# Altium PCB Combo 1.PcbDoc
Units mil, origin at the board's own origin, x right, y up, seen from the top; angles counter-clockwise.
Board outline not stored, 4 copper layers (Top Layer, Internal Plane 2, Internal Plane 1, Bottom Layer); 61 components, 0 nets, 218 pads, 145 vias.
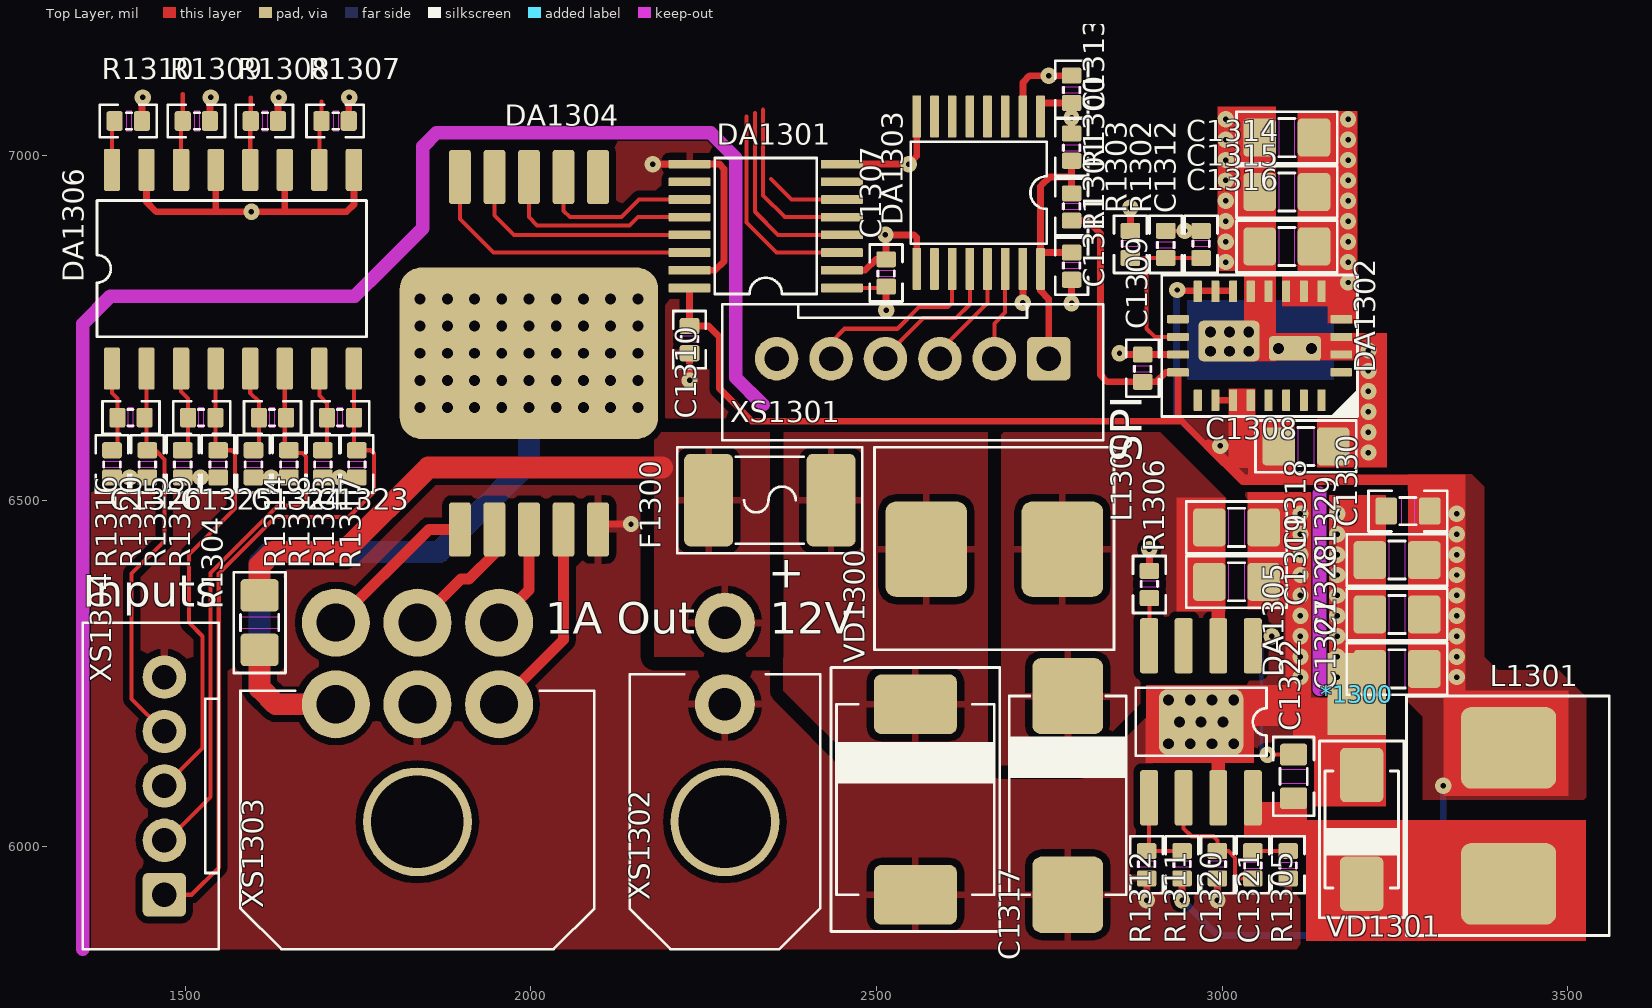
[diagram p0: Top Layer view]
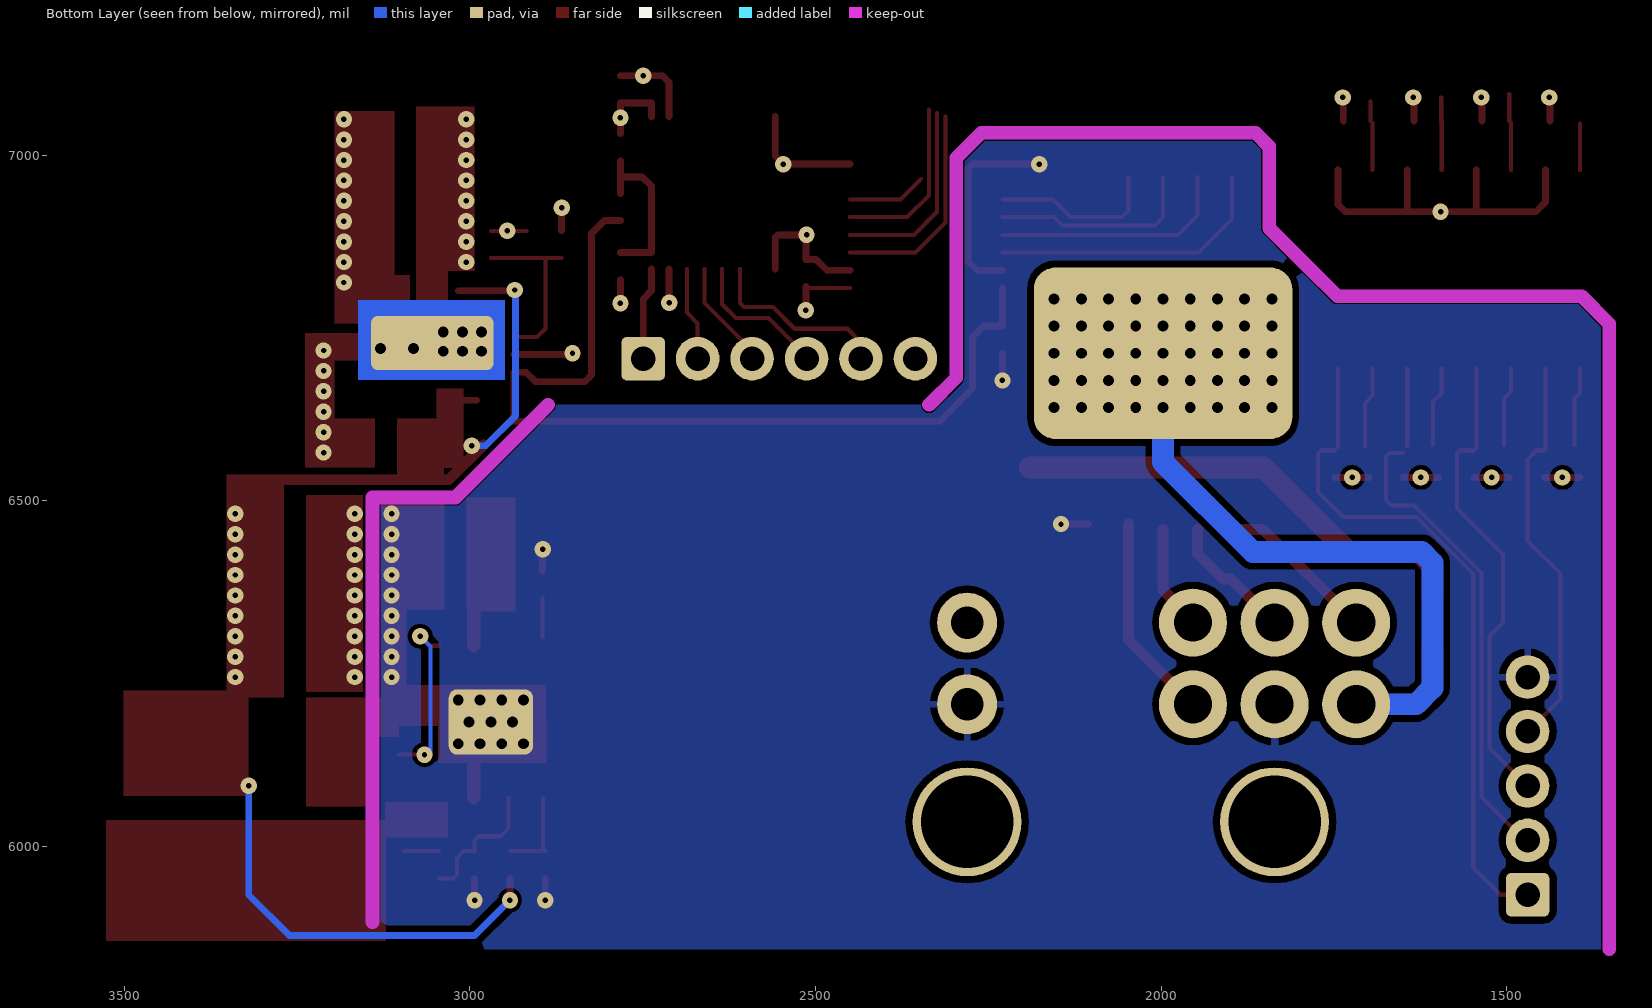
[diagram p1: Bottom Layer view, seen from below]
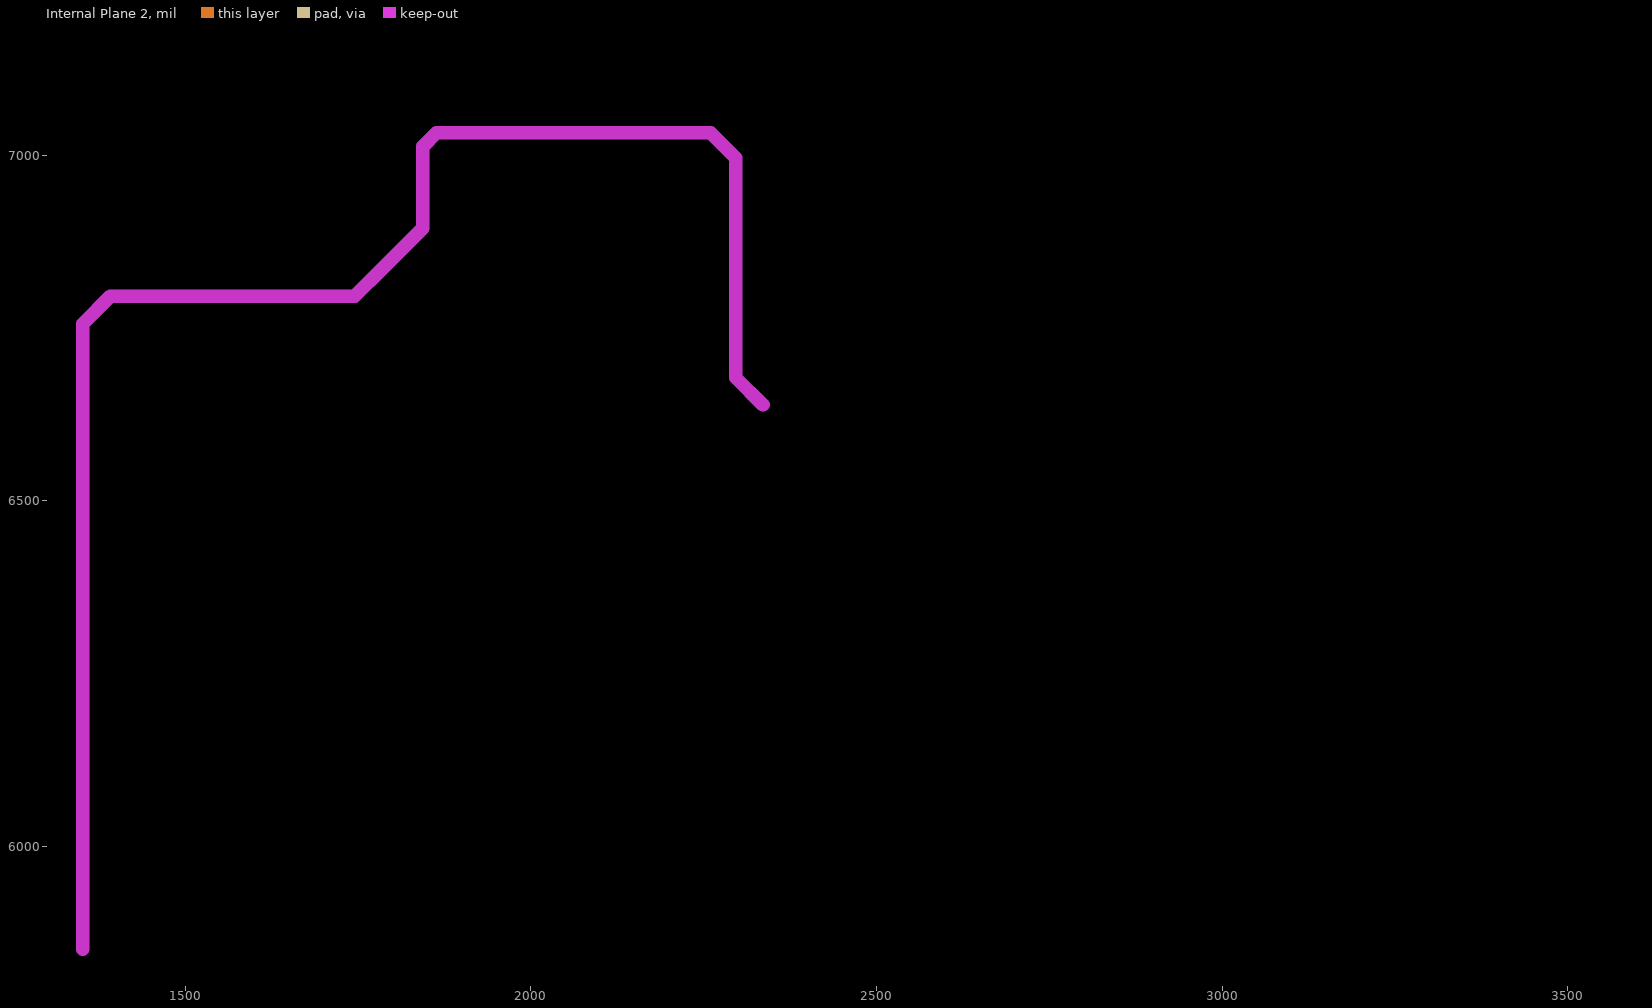
[diagram p2: Internal Plane 2, clearances drawn from the general rule]
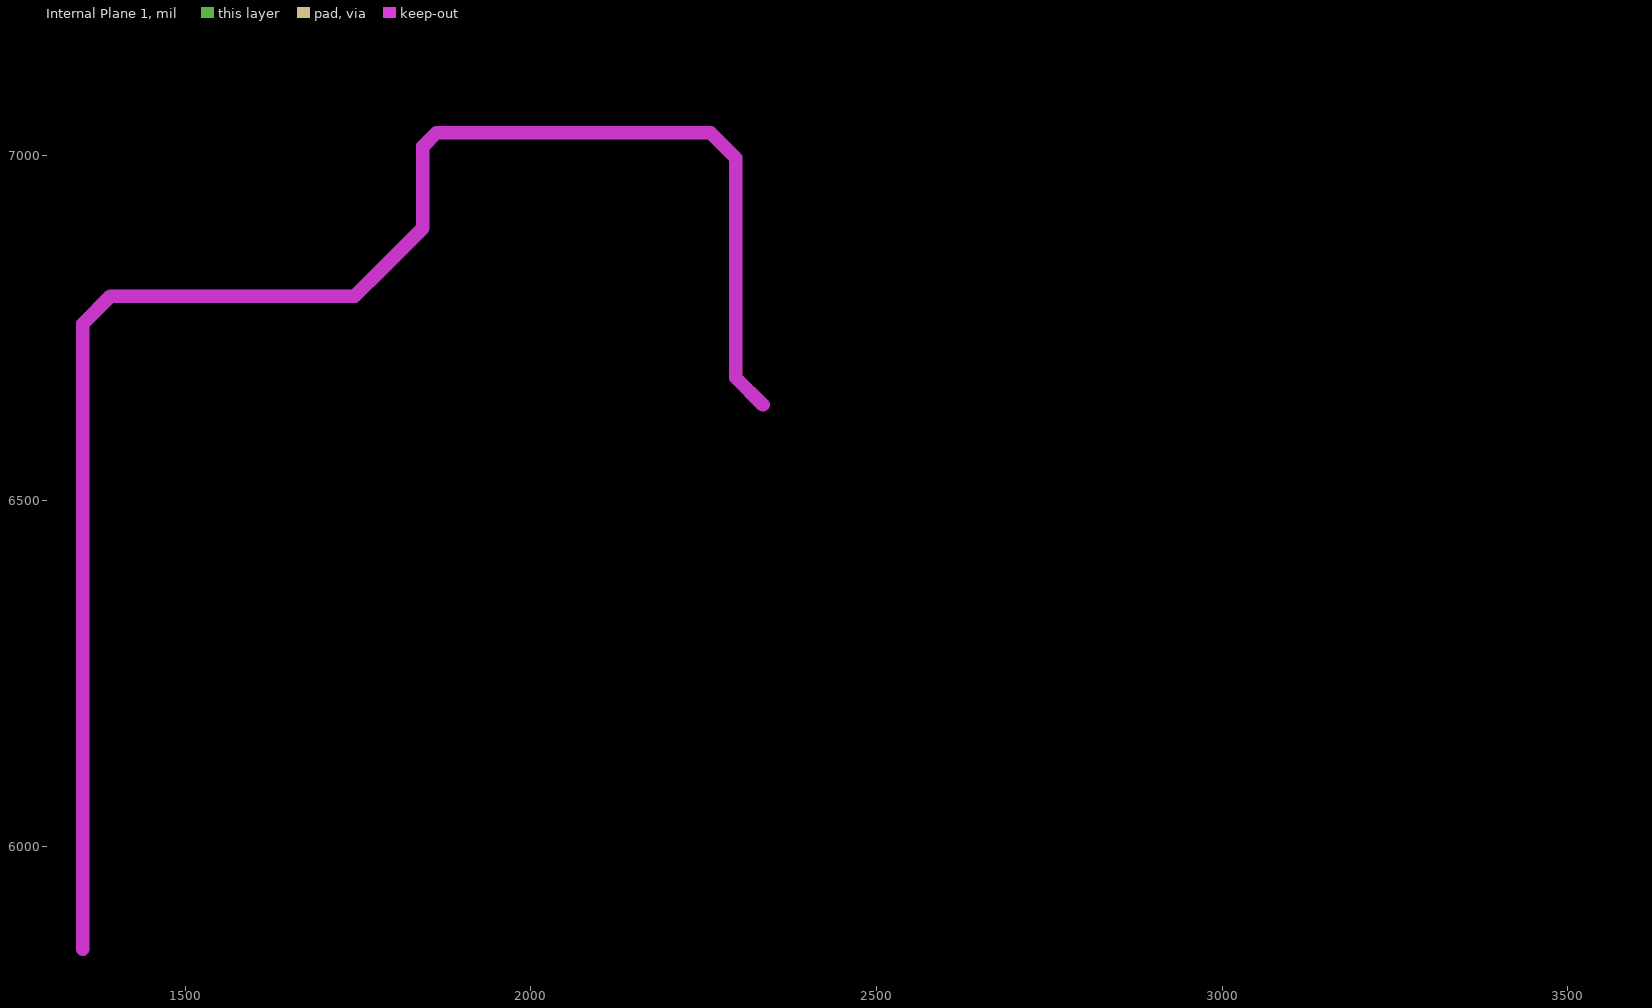
[diagram p3: Internal Plane 1, clearances drawn from the general rule]

## Layer stack, top to bottom
Top Solder: solder mask 0.4, Solder Resist, Dk 3.5
Top Layer: signal copper 1.4
Dielectric 1: dielectric 12.6, FR-4, Dk 4.8
Internal Plane 2: plane copper 1.4
Dielectric2: dielectric 12.6, FR-4, Dk 4.8
Internal Plane 1: plane copper 1.4
Dielectric3: dielectric 12.6, FR-4, Dk 4.8
Bottom Layer: signal copper 1.4
Bottom Solder: solder mask 0.4, Solder Resist, Dk 3.5

## Design rules (kind name [scope] priority, off if disabled: settings)
RoomDefinition "Power, DiscIO, SPI" [InComponentClass('Components Class 1')] p1: confinementstyle=ConfineIn formatcopy=TRUE lockcomponents=FALSE outline 1312.2,5811.93 3595.67,5811.93 3595.67,7150.51 1312.2,7150.51

## Components (designator, comment, footprint, x,y, rotation, side; value= is the part's Value field where it differs from the comment)
*1300 "Перемычка" Перемычка 3195.08,6220.39 r90 top
C1307 "0,1" CAP0402 2513.98,6809.96 r90 top
C1308 "22,0" CAP0805#1 3081.89,6578.66 r0 top
C1309 "1,0" CAP0402 2885.04,6672.17 r90 top
C1310 "0,1" CAP0402 2229.53,6752.87 r270 top
C1311 "0,1" CAP0402 2782.28,6859.17 r270 top
C1312 "18" CAP0402 2969.68,6890.67 r270 top
C1313 "0,1" CAP0402 2782.28,7075.71 r90 top
C1314 "22,0" CAP0805#1 3133.07,7025.51 r180 top
C1315 "22,0" CAP0805#1 3133.07,6946.77 r180 top
C1316 "22,0" CAP0805#1 3133.07,6868.03 r180 top
C1317 "47x25V" CAP_D 2776.77,6217.44 r270 top
C1318 "2,2" CAP0805#1 2981.5,6461.54 r0 top
C1319 "2,2" CAP0805#1 2981.5,6382.79 r0 top
C1320 "3,3pF" CAP0402 2993.31,5993.03 r270 top
C1321 "4700" CAP0402 3044.49,5953.66 r90 top
C1322 "0,1" CAP0603#1 3103.54,6132.8 r270 top
C1323 "0,1" CAP0402 1704.94,6620.39 r0 top
C1324 "0,1" CAP0402 1606.51,6620.39 r0 top
C1325 "0,1" CAP0402 1504.15,6620.39 r0 top
C1326 "0,1" CAP0402 1401.79,6620.39 r0 top
C1327 "22,0" CAP0805#1 3292.52,6256.81 r180 top
C1328 "22,0" CAP0805#1 3292.52,6335.56 r180 top
C1329 "22,0" CAP0805#2 3253.15,6414.29 r180 top
C1330 "2,2" CAP0603#2 3268.9,6485.16 r180 top
DA1301 "ISO7140F" TSSOP16 2450,6807.99 r180 top
DA1302 "EN5339QI" EN5339QI 3054.33,6724.33 r180 top
DA1303 "ISO7141" TSSOP16 2737.4,7056.02 r270 top
DA1304 "VN340SP" PowerSO10 1997.24,6713.5 r0 top
DA1305 "TPS54340" SO8-3.9_P 2969.69,6180.04 r270 top
DA1306 "TLP281-4" SOP16 1393.91,6695.19 r90 top
F1300 "1,5A" MF-MSMF 2257.09,6500.91 r0 top
L1300 "10uH" IND2525 2670.47,6430.04 r0 top
L1301 "6,8uH" IND2525 3414.57,6044.21 r90 top
R1300 "0*" RES0402 2782.28,6992.05 r90 top
R1301 "0*" RES0402 2782.28,6944.8 r270 top
R1302 "330K" RES0402 2918.5,6851.3 r90 top
R1303 "75K" RES0402 2867.32,6890.67 r270 top
R1304 "0" RES0805 1607.48,6284.37 r90 top
R1305 "24K" RES0402 3095.67,5953.66 r90 top
R1306 "150K" RES0402 2894.88,6398.54 r270 top
R1307 "2,2K" RES0402 1736.43,7049.52 r180 top
R1308 "2,2K" RES0402 1634.07,7049.52 r180 top
R1309 "2,2K" RES0402 1535.65,7049.52 r180 top
R1310 "2,2K" RES0402 1437.22,7049.52 r180 top
R1311 "62K" RES0402 2942.13,5993.03 r270 top
R1312 "12K" RES0402 2890.94,5993.03 r270 top
R1313 "4,7K" RES0402 1699.03,6533.77 r90 top
R1314 "4,7K" RES0402 1598.64,6533.77 r90 top
R1315 "4,7K" RES0402 1496.28,6533.77 r90 top
R1316 "4,7K" RES0402 1393.91,6533.77 r90 top
R1317 "10K" RES0402 1748.24,6533.77 r90 top
R1318 "10K" RES0402 1649.82,6533.77 r90 top
R1319 "10K" RES0402 1547.47,6533.77 r90 top
R1320 "10K" RES0402 1445.09,6533.77 r90 top
VD1300 "SMCJ26A" SMC 2556.3,5910.35 r90 top
VD1301 "SX34" SMA 3201.97,6103.27 r270 top
XS1301 "SPI" MW-6M 2749.21,6705.63 r180 top
XS1302 "12V" uF-2X1R 2280.71,6323.74 r270 top
XS1303 "1A Out" uF-2X3R 1953.94,6323.74 r270 top
XS1304 "Inputs" MW-5M 1469.69,5930.04 r90 top

## Footprints (in the part's own frame and the unit in brackets; to place one, negate y for a bottom-side part, rotate by r counter-clockwise, add the part's x,y. Pads: shape width x height; smd on the part's side, far side on the other; paste and mask are expansions set on the pad)
CAP0402 [mm]
  rrect25% 0.59x0.72 smd: 1(0,0) 2(1,0)
  Top Layer keep-out region: 0.375,0.36 0.375,-0.36 0.575,-0.36 0.575,0.36
  silkscreen extent -0.55,-0.6 1.55,0.6, body extent 0,-0.25 1,0.25, height 0.49
CAP0603#1 [mm]
  rrect25% 0.8x1 smd: 1(0,0) 2(1.6,0)
  Top Layer keep-out region: 0.55,0.5 0.55,-0.5 1.05,-0.5 1.05,0.5
  silkscreen extent -0.65,-0.75 2.25,0.75, body extent 0,-0.4 1.6,0.4, height 0.65
CAP0603#2 [mm]
  rrect25% 0.8x1 smd: 1(-0.8,0) 2(0.8,0)
  Top Layer keep-out region: -0.25,0.5 -0.25,-0.5 0.25,-0.5 0.25,0.5
  silkscreen extent -1.45,-0.75 1.45,0.75, body extent -0.8,-0.4 0.8,0.4, height 0.65
CAP0805#1 [mm]
  rrect25% 1.2x1.4 smd: 1(0,0) 2(2,0)
  Top Layer keep-out region: 0.7,-0.7 1.3,-0.7 1.3,0.7 0.7,0.7
  silkscreen extent -0.85,-0.95 2.85,0.95, body extent 0,-0.62 2,0.63, height 1
CAP0805#2 [mm]
  rrect25% 1.2x1.4 smd: 1(-1,0) 2(1,0)
  Top Layer keep-out region: -0.3,-0.7 0.3,-0.7 0.3,0.7 -0.3,0.7
  silkscreen extent -1.85,-0.95 1.85,0.95, body extent -1,-0.62 1,0.63, height 1
CAP_D [mm]
  rrect25% 2.8x2.6 smd: 1(0,0) 2(7.3,0)
  silkscreen extent 0,-2.15 7.3,2.15, body extent 0.02,-2.15 7.32,2.15, height 2.81
EN5339QI [mm]
  rrect25% 0.8x0.3 smd: 1(-3,0.975) 2(-3,0.325) 3(-3,-0.325) 4(-3,-0.975) 13(3,-0.975) 14(3,-0.325) 15(3,0.325) 16(3,0.975)
  rrect25% 0.3x0.8 smd: 5(-2.275,-2) 6(-1.625,-2) 7(-0.975,-2) 8(-0.325,-2) 9(0.325,-2) 10(0.975,-2) 11(1.625,-2) 12(2.275,-2) 17(2.275,2) 18(1.625,2) 19(0.975,2) 20(0.325,2) 21(-0.325,2) 22(-0.975,2) 23(-1.625,2) 24(-2.275,2)
  rrect25% 1.9x0.9 smd: 25(-1.3,0.1)
  rrect25% 4.5x2 smd far side: 25(0,-0.1)
  rrect25% 2.25x1.5 smd: 26(1.125,-0.175)
  silkscreen extent -3.6,-2.6 3.6,2.6, body extent -3,-2 3,2, height 1.6
IND2525 [mm]
  rrect25% 3x3.5 smd: 1(-2.5,0) 2(2.5,0)
  silkscreen extent -4.4,-3.7 4.4,3.75, body extent -3.68,-3.39 3.6,3.39, height 4.99
MF-MSMF [mm]
  rrect25% 1.8x3.4 smd: 1(0,0) 2(4.5,0)
  silkscreen extent -1.15,-1.95 5.65,1.95, body extent 0,-1.6 4.5,1.6, height 0.7
MW-5M [mm]
  rrect25% 1.6x1.6 hole 0.9: 1(0,0)
  round 1.6 hole 0.9: 2(2,0) 3(4,0) 4(6,0) 5(8,0)
  silkscreen extent -2,-2 10,3, body extent -2,-2 10,3, height 6
MW-6M [mm]
  rrect25% 1.6x1.6 hole 0.9: 1(0,0)
  round 1.6 hole 0.9: 2(2,0) 3(4,0) 4(6,0) 5(8,0) 6(10,0)
  silkscreen extent -2,-2 12,3, body extent -2,-1.75 12,2.75, height 6
PowerSO10 [mm]
  rrect25% 9.5x6.3 all layers, no hole: 0(0,0)
  rrect25% 0.8x2 smd: 1(-2.54,-6.477) 2(-1.27,-6.477) 3(0,-6.477) 4(1.27,-6.477) 5(2.54,-6.477) 6(2.54,6.477) 7(1.27,6.477) 8(0,6.477) 9(-1.27,6.477) 10(-2.54,6.477)
  body extent -4.7,-6.95 4.7,6.95, height 3.35
RES0402 [mm]
  rrect25% 0.59x0.72 smd: 1(0,0) 2(1,0)
  Top Layer keep-out region: 0.375,0.36 0.375,-0.36 0.575,-0.36 0.575,0.36
  silkscreen extent -0.55,-0.6 1.55,0.6, body extent 0,-0.25 1,0.25, height 0.33
RES0805 [mm]
  rrect25% 1.2x1.4 smd: 1(0,0) 2(2,0)
  Top Layer keep-out region: 0.8,-0.7 1.2,-0.7 1.2,0.7 0.8,0.7
  silkscreen extent -0.85,-0.95 2.85,0.95, body extent 0,-0.62 2,0.63, height 0.51
SMA [mm]
  rrect25% 2x1.6 smd: 1(0,0) 2(4,0)
  silkscreen extent -1.25,-1.55 5.25,1.55, body extent -0.6,-1.3 4.6,1.3, height 2.4
SMC [mm]
  rrect25% 2.2x3.05 smd: 1(0.5,0) 2(7.5,0)
  silkscreen extent -0.85,-3.1 8.85,3.1, body extent 0.03,-2.95 7.98,2.95, height 2.3
SO8-3.9_P [mil]
  rrect25% 94.49x122.05 hole 15.75 unplated: 0(0,0)
  rrect25% 80x26 smd: 1(-110.24,74.8) 2(-110.24,24.8) 3(-110.24,-25.2) 4(-110.24,-75.2) 5(109.76,-75.2) 6(109.76,-25.2) 7(109.76,24.8) 8(109.76,74.8)
  silkscreen extent -50,-94 49,94, body extent -118,-98 118,98, height 69
SOP16 [mm]
  rrect25% 1.55x0.6 smd: 1(-0.1,0) 2(-0.1,-1.27) 3(-0.1,-2.54) 4(-0.1,-3.81) 5(-0.1,-5.08) 6(-0.1,-6.35) 7(-0.1,-7.62) 8(-0.1,-8.89) 9(7.205,-8.89) 10(7.205,-7.62) 11(7.205,-6.35) 12(7.205,-5.08) 13(7.205,-3.81) 14(7.205,-2.54) 15(7.205,-1.27) 16(7.205,0)
  silkscreen extent 1.08,-9.35 6.08,0.55, body extent 0.44,-9.42 6.64,0.58, height 1.7
TSSOP16 [mm]
  rrect25% 1.55x0.32 smd: 1(0,0) 2(0,-0.65) 3(0,-1.3) 4(0,-1.95) 5(0,-2.6) 6(0,-3.25) 7(0,-3.9) 8(0,-4.55) 9(5.6,-4.55) 10(5.6,-3.9) 11(5.6,-3.25) 12(5.6,-2.6) 13(5.6,-1.95) 14(5.6,-1.3) 15(5.6,-0.65) 16(5.6,0)
  silkscreen extent 0.92,-4.77 4.67,0.23, body extent -0.45,-4.82 6.05,0.28, height 1.2
uF-2X1R [mm]
  round 4 hole 3.4: 0(7.32,0)
  round 2.2 hole 1.2: 1(0,0) 2(3,0)
  silkscreen extent 1.9,-3.5 12,3.5, body extent -0.32,-3.6 11.92,3.55, height 8.77
uF-2X3R [mm]
  round 4 hole 3.4: 0(7.32,-3)
  round 2.5 hole 1.4: 1(0,0) 2(3,0) 3(0,-3) 4(3,-3) 5(0,-6) 6(3,-6)
  silkscreen extent 2.5,-9.5 12,3.5, body extent -0.29,-9.57 11.95,3.58, height 8.83
Перемычка [mm]
  rect 1.6x2.15 smd: 1(-0.7,0) 2(0.7,0)

## Part data
C1307 C1309 C1310 C1311 C1312 C1313 C1320 C1321 C1323 C1324 C1325 C1326: library part CAP_0402, "Конденсатор чип"
C1308 C1314 C1315 C1316 C1318 C1319 C1327 C1328 C1329: library part CAP_0805, "Конденсатор чип"
C1317: library part CAP_D, "Конденсатор танталовый"
C1322 C1330: library part CAP_0603, "Конденсатор чип"
DA1301: "Цифровой изолятор 4 вых"
DA1302 DA1305: "DC преобразователь понижающий"
DA1303: "Цифровой изолятор 3 вх 1 вых"
DA1304: "Драйвер MOSFET верхнего плеча 4 шт."
DA1306: library part TLP281-4_1, "Оптопара 4 канала"
F1300: library part MF-MSMF, "Предохранитель самовосстанавливающийся"
L1300 L1301: library part IND_2525, "Индуктивность чип"
R1300 R1301 R1302 R1303 R1305 R1306 R1307 R1308 R1309 R1310 R1311 R1312 R1313 R1314 R1315 R1316 R1317 R1318 R1319 R1320: library part RES_0402, "Резистор чип"
R1304: library part RES_0805, "Резистор чип"
VD1300: library part SMCJxx, "Диод TVS"
VD1301: "Диод Шоттки"
XS1301 XS1303: library part Разъем6, "Разъем"
XS1302: library part Разъем2_1, "Разъем"
XS1304: library part Разъем5, "Разъем"

## Via types
v1: diameter 23.62, hole 7.87, Top Layer to Bottom Layer, tented both sides, 79 vias
v2: diameter 23.62, hole 15.75, Top Layer to Bottom Layer, 54 vias
v3: diameter 23.62, hole 15.75, Top Layer to Bottom Layer, tented both sides, 10 vias
v4: diameter 23.62, hole 7.87, Top Layer to Bottom Layer, 2 vias

## Nets (pads, with @x,y where several pads share a name; then routed paths per layer and width w, separated by ;. In a path a pad name is that pad's centre, name@x,y a point inside that pad or via, vN(x,y) a via of type N, cw(c..) or ccw(c..) an arc to the next point about the centre after c; other vN are vias at no path point)
pads on no net: *1300.1 *1300.2 C1307.1 C1307.2 C1308.1 C1308.2 C1309.1 C1309.2 C1310.1 C1310.2 C1311.1 C1311.2 C1312.1 C1312.2 C1313.1 C1313.2 C1314.1 C1314.2 C1315.1 C1315.2 C1316.1 C1316.2 C1317.1 C1317.2 C1318.1 C1318.2 C1319.1 C1319.2 C1320.1 C1320.2 C1321.1 C1321.2 C1322.1 C1322.2 C1323.1 C1323.2 C1324.1 C1324.2 C1325.1 C1325.2 C1326.1 C1326.2 C1327.1 C1327.2 C1328.1 C1328.2 C1329.1 C1329.2 C1330.1 C1330.2 DA1301.1 DA1301.2 DA1301.3 DA1301.4 DA1301.5 DA1301.6 DA1301.7 DA1301.8 DA1301.9 DA1301.10 DA1301.11 DA1301.12 DA1301.13 DA1301.14 DA1301.15 DA1301.16 DA1302.1 DA1302.2 DA1302.3 DA1302.4 DA1302.5 DA1302.6 DA1302.7 DA1302.8 DA1302.9 DA1302.10 DA1302.11 DA1302.12 DA1302.13 DA1302.14 DA1302.15 DA1302.16 DA1302.17 DA1302.18 DA1302.19 DA1302.20 DA1302.21 DA1302.22 DA1302.23 DA1302.24 DA1302.25 DA1302.26 DA1303.1 DA1303.2 DA1303.3 DA1303.4 DA1303.5 DA1303.6 DA1303.7 DA1303.8 DA1303.9 DA1303.10 DA1303.11 DA1303.12 DA1303.13 DA1303.14 DA1303.15 DA1303.16 DA1304.0 DA1304.1 DA1304.2 DA1304.3 DA1304.4 DA1304.5 DA1304.6 DA1304.7 DA1304.8 DA1304.9 DA1304.10 DA1305.0 DA1305.1 DA1305.2 DA1305.3 DA1305.4 DA1305.5 DA1305.6 DA1305.7 DA1305.8 DA1306.1 DA1306.2 DA1306.3 DA1306.4 DA1306.5 DA1306.6 DA1306.7 DA1306.8 DA1306.9 DA1306.10 DA1306.11 DA1306.12 DA1306.13 DA1306.14 DA1306.15 DA1306.16 F1300.1 F1300.2 L1300.1 L1300.2 L1301.1 L1301.2 R1300.1 R1300.2 R1301.1 R1301.2 R1302.1 R1302.2 R1303.1 R1303.2 R1304.1 R1304.2 R1305.1 R1305.2 R1306.1 R1306.2 R1307.1 R1307.2 R1308.1 R1308.2 R1309.1 R1309.2 R1310.1 R1310.2 R1311.1 R1311.2 R1312.1 R1312.2 R1313.1 R1313.2 R1314.1 R1314.2 R1315.1 R1315.2 R1316.1 R1316.2 R1317.1 R1317.2 R1318.1 R1318.2 R1319.1 R1319.2 R1320.1 R1320.2 VD1300.1 VD1300.2 VD1301.1 VD1301.2 XS1301.1 XS1301.2 XS1301.3 XS1301.4 XS1301.5 XS1301.6 XS1302.0 XS1302.1 XS1302.2 XS1303.0 XS1303.1 XS1303.2 XS1303.3 XS1303.4 XS1303.5 XS1303.6 XS1304.1 XS1304.2 XS1304.3 XS1304.4 XS1304.5
copper on no net: | length 16152.8
  Top Layer w5.91: 1393.91,6691.25 1393.91,6655.82 1401.79,6647.94 1401.79,6620.39 1401.79,6581.02 ; 1393.91,6978.85 1393.91,7045.58 ; 1443.91,6574.32 1443.91,6691.25 ; 1445.09,6573.14 1456.5,6573.14 1469.68,6559.96 1469.68,6441.85 1422.44,6394.61 1422.44,6213.5 1469.68,6166.26 ; 1469.68,5930.04 1509.06,5930.04 1548.43,5969.41 1548.43,6394.61 1630.16,6476.34 1736.46,6476.34 1772.83,6512.72 1772.83,6568.24 1767.93,6573.14 1748.24,6573.14 ; 1469.68,6004.84 1536.61,6071.77 1536.61,6395.56 1634.08,6493.03 1666.54,6493.03 1674.41,6500.91 1674.41,6564.3 1669.5,6569.2 1649.82,6569.2 ; 1469.69,6087.52 1524.8,6142.64 1524.8,6304.06 1505.12,6323.74 1505.12,6422.17 1572.05,6489.09 1572.05,6568.24 1567.15,6573.14 1547.47,6573.14 ; 1493.91,6691.25 1493.91,6658.18 1504.15,6647.94 1504.15,6620.39 1504.15,6581.01 ; 1493.91,6978.85 1493.91,7047.16 ; 1496.28,7049.52 1496.28,7088.52 ; 1543.91,6576.69 1543.91,6691.25 ; 1593.91,6691.25 1593.91,6656.2 1606.51,6643.61 1606.51,6620.39 1606.51,6581.02 ; 1593.91,6978.85 1593.91,7048.73 ; 1594.7,7049.52 1594.7,7083.6 ; 1643.91,6579.05 1643.91,6691.25 ; 1693.91,6691.25 1693.91,6652.06 1704.94,6641.04 1704.94,6620.39 1704.94,6579.05 ; 1693.91,6978.85 1693.91,7046.37 ; 1697.06,7049.52 1697.06,7077.69 ; 1743.91,6577.47 1743.91,6691.25 ; 1897.24,6968.5 1897.24,6907.99 1946.06,6859.17 2229.53,6859.17 ; 1947.24,6968.5 1947.24,6913.11 1975.59,6884.76 2229.53,6884.76 ; 1997.24,6968.5 1997.24,6910.35 2009.06,6898.54 2142.91,6898.54 2154.72,6910.35 2229.53,6910.35 ; 2047.24,6968.5 2047.24,6919.41 2056.3,6910.35 2131.1,6910.35 2156.69,6935.94 2229.53,6935.94 ; 2312.2,7056.02 2312.2,6902.48 2355.51,6859.17 2450,6859.17 ; 2324.02,7060.92 2324.02,6918.23 2357.48,6884.76 2450,6884.76 ; 2335.83,7065.81 2335.83,6941.85 2367.32,6910.35 2450,6910.35 ; 2347.64,6965.47 2377.17,6935.94 2450,6935.94 ; 2434.25,6705.63 2434.25,6729.25 2453.94,6748.94 2530.09,6748.94 2561.59,6780.43 2603.54,6780.43 2609.45,6786.34 2609.45,6835.55 ; 2450,6807.99 2512.01,6807.99 2513.98,6809.96 ; 2512.99,6705.63 2512.99,6709.57 2568.11,6764.69 2615.35,6764.69 2635.04,6784.37 2635.04,6835.55 ; 2591.73,6705.63 2591.73,6717.44 2660.63,6786.34 2660.63,6835.55 ; 2670.47,6705.63 2670.47,6756.81 2686.22,6772.56 2686.22,6835.55 ; 2867.32,6851.3 2918.5,6851.3 2969.68,6851.3 ; 2890.94,6851.3 2890.94,6748.94 2902.76,6737.13 2936.22,6737.13 ; 2894.49,6070.28 2894.49,5996.57 2890.94,5993.03 2942.13,5993.03 ; 2894.88,6302.09 2894.88,6359.17 ; 2918.5,6890.67 2969.68,6890.67 ; 2944.49,6070.28 2944.49,6026.1 2955.91,6014.68 2987.4,6014.68 2993.31,6008.78 2993.31,5993.03 3009.06,5993.03 3018.9,5983.19 3018.9,5959.57 3024.8,5953.66 3044.49,5953.66 ; 3044.49,5993.03 3095.67,5993.03 ; 3044.49,6290.28 3058.26,6290.28 v1(3072.04,6304.05) ; v1(3065.75,6132.8) 3103.54,6132.8
  Top Layer w9.84: 1393.91,6533.77 1445.09,6533.77 ; 1437.22,7049.52 1437.22,7082.61 v1(1438.19,7083.58) ; 1443.91,6978.85 1443.91,6932.19 1457.87,6918.23 1733.46,6918.23 1743.91,6928.68 1743.91,6978.85 ; 1496.28,6533.77 1547.47,6533.77 ; 1535.65,7049.52 1535.65,7082.61 v1(1536.61,7083.58) ; 1543.91,6918.8 1543.91,6978.85 ; 1598.64,6533.77 1649.82,6533.77 ; 1634.07,7049.52 1634.07,7082.61 v1(1635.04,7083.58) ; 1643.91,6919.23 1643.91,6978.85 ; 1699.03,6533.77 1748.24,6533.77 ; 1736.43,7049.52 1736.43,7082.61 v1(1737.4,7083.58) ; 2105.12,6466.38 v1(2144.8,6466.38) ; v4(2176.38,6987.13) 2229.53,6987.13 2272.72,6987.13 2279.53,6980.31 2279.53,6846.46 2266.65,6833.58 2229.53,6833.58 ; v4(2229.53,6674.13) 2229.53,6713.5 ; 2229.53,6807.99 2229.53,6752.87 2257.09,6752.87 2272.83,6737.13 2272.83,6662.32 2320.08,6615.08 2942.13,6615.08 ; 2450,6833.58 2483.46,6833.58 2499.21,6849.33 2513.98,6849.33 v1@2513.98,6884.76 ; 2450,6987.13 v1(2546.46,6987.13) 2558.27,6998.94 2558.27,7056.02 ; v1(2512.99,6884.76) v1@2513.98,6884.76 ; v1(2513.98,6775.51) 2513.98,6809.96 ; 2558.27,6835.55 2558.27,6880.83 2554.33,6884.76 v1@2513.98,6884.76 ; v1(2711.81,6786.34) 2711.81,6835.55 ; 2711.81,7056.02 2711.81,7105.24 2721.65,7115.08 2782.28,7115.08 ; 2737.4,6835.55 2737.4,6804.06 2749.21,6792.24 2749.21,6705.63 ; 2737.4,6955.04 2737.4,6859.17 2782.28,6859.17 ; 2737.4,7056.02 2737.4,7075.71 2782.28,7075.71 2782.28,7031.42 ; 2738.98,6956.61 2750.79,6968.43 2782.28,6968.43 ; v1(2782.28,6785.94) 2782.28,6819.8 ; 2782.28,6905.43 2805.32,6905.43 2824.02,6886.73 2824.02,6682.01 2833.86,6672.17 2885.04,6672.17 2904.72,6672.17 2918.5,6685.94 2936.22,6685.94 2936.22,6620.98 2942.13,6615.08 ; 2782.28,6944.8 2782.28,6968.43 ; 2782.28,6992.05 2782.28,6968.43 ; v1(2851.57,6713.5) 2849.61,6711.54 2885.04,6711.54 2936.22,6711.54 ; 2867.32,6890.67 v1(2867.32,6924.13) ; v1(2890.94,5922.17) 2890.94,5953.66 ; 2894.88,6398.54 v1(2894.88,6430.04) ; v1(2942.13,5922.17) 2942.13,5953.66 ; 2965.75,6804.06 2944.09,6804.06 2991.34,6804.06 3016.93,6804.06 ; 2990.35,6645.59 3015.94,6645.59 ; v1(2993.31,5922.17) 2993.31,5953.66 ; 3081.89,6578.66 2978.54,6578.66 2942.13,6615.08
  Top Layer w15.75: 1717.72,6323.74 1852.48,6458.5 1897.24,6458.5 ; 1835.83,6323.74 1898.82,6386.73 1910.63,6386.73 1947.24,6423.35 1947.24,6458.5 ; 1953.94,6205.63 2047.24,6298.94 2047.24,6458.5 2047.24,6466.38 ; 1953.94,6323.74 1953.94,6327.68 1997.24,6370.98 1997.24,6458.5 ; 2980.51,6580.63 3030.71,6530.43 3290.55,6530.43
  Top Layer w19.68: 2994.49,6070.28 v2@2994.49,6155.24 ; 2994.49,6290.28 2994.49,6377.68
  Top Layer w31.5: 1607.48,6284.37 1607.48,6229.25 1631.1,6205.63 1717.72,6205.63 ; 1607.48,6363.11 1607.48,6406.42 1627.17,6426.1 1729.53,6426.1 1851.57,6548.15 2190.16,6548.15
  Bottom Layer w5.91: v1(3065.75,6132.8) 3057.28,6132.8 3057.28,6289.29 v1(3072.04,6304.05)
  Bottom Layer w9.84: v1@2934.25,6804.06 2934.25,6622.95 2977.56,6579.65 v1(2997.24,6579.65) ; v1(2942.13,5922.17) 2993.31,5870.98 3261.02,5870.98 3320.08,5930.04 v1(3320.08,6087.52)
  Bottom Layer w31.5: 1717.72,6205.63 1631.1,6205.63 1607.48,6229.25 1607.48,6410.35 1623.23,6426.1 1867.32,6426.1 1997.24,6556.02 v2(1997.24,6634.76) v2(1997.24,6674.13) v3(1997.24,6713.5)
  other v1: 3113.39,6245 3166.54,6245 3339.76,6245 3113.39,6274.53 3166.54,6274.53 3339.76,6274.53 3113.39,6304.06 3166.54,6304.06 3339.76,6304.06 3113.39,6333.58 3166.54,6333.58 3339.76,6333.58 3113.39,6363.11 3166.54,6363.11 3339.76,6363.11 3113.39,6392.64 3166.54,6392.64 3339.76,6392.64 3113.39,6422.17 3166.54,6422.17 3339.76,6422.17 3113.39,6451.69 3166.54,6451.69 3339.76,6451.69 3113.39,6481.22 3166.54,6481.22 3339.76,6481.22 1419.5,6533.77 1521.88,6533.77 1624.23,6533.77 1723.64,6533.77 3211.81,6569.8 3211.81,6599.33 3211.81,6628.86 3211.81,6658.39 3211.81,6687.91 3211.81,6717.44 2935.24,6805.04 3182.28,6815.87 3005.12,6845.39 3182.28,6845.39 3005.12,6874.92 3182.28,6874.92 2946.06,6890.67 3005.12,6904.45 3182.28,6904.45 1595.67,6918.23 3005.12,6933.98 3182.28,6933.98 3005.12,6963.5 3182.28,6963.5 3005.12,6993.03 3182.28,6993.03 3005.12,7022.56 3182.28,7022.56 3005.12,7052.09 3182.28,7052.09 2782.28,7054.06 2749.21,7115.08
  other v2: 2922.44,6148.54 2953.94,6148.54 2985.43,6148.54 3016.93,6148.54 2938.19,6180.04 3001.18,6180.04 2922.44,6211.54 2953.94,6211.54 2985.43,6211.54 3016.93,6211.54 1839.76,6634.76 1879.13,6634.76 1918.5,6634.76 1957.87,6634.76 2036.61,6634.76 2075.98,6634.76 2115.35,6634.76 2154.72,6634.76 1839.76,6674.13 1879.13,6674.13 1918.5,6674.13 1957.87,6674.13 2036.61,6674.13 2075.98,6674.13 2115.35,6674.13 2154.72,6674.13 1839.76,6713.5 1879.13,6713.5 1918.5,6713.5 1957.87,6713.5 2036.61,6713.5 2075.98,6713.5 2115.35,6713.5 2154.72,6713.5 1839.76,6752.87 1879.13,6752.87 1918.5,6752.87 1957.87,6752.87 1997.24,6752.87 2036.61,6752.87 2075.98,6752.87 2115.35,6752.87 2154.72,6752.87 1839.76,6792.24 1879.13,6792.24 1918.5,6792.24 1957.87,6792.24 1997.24,6792.24 2036.61,6792.24 2075.98,6792.24 2115.35,6792.24 2154.72,6792.24
  other v3: 2969.69,6180.04 2983.46,6716.46 3011.02,6716.46 3038.58,6716.46 3081.89,6720.39 3129.13,6720.39 2983.46,6744.02 3011.02,6744.02 3038.58,6744.02

## Polygon pours and split planes (outlines as drawn)
no net on Top Layer "Bottom Layer-No Net" (solid, remove dead copper, pour order 19): 2680.32,6599.33 2680.32,6117.05 2792.52,6117.05 3014.96,6339.49 3014.96,6495 2910.63,6599.33
no net on Top Layer "Bottom Layer-No Net" (solid, remove dead copper, pour order 14): 2178.35,6599.33 2178.35,6274.53 2345.67,6274.53 2345.67,6599.33
no net on Top Layer "Bottom Layer-No Net" (solid, remove dead copper, pour order 15): 2365.35,6599.33 2365.35,6225.31 2473.62,6117.05 2660.63,6117.05 2660.63,6599.33
no net on Top Layer "Bottom Layer-No Net" (solid, remove dead copper, pour order 22): 3268.9,6538.31 3268.9,6404.45 3268.9,6209.57 3290.55,6187.91 3290.55,6067.83 3388.98,6067.83 3526.77,6067.83 3526.77,6215.47 3487.4,6254.84 3398.82,6254.84 3379.13,6274.53 3379.13,6520.59 3361.42,6538.31
no net on Top Layer "Bottom Layer-Common" (solid, remove dead copper, pour order 18): 3053.35,6535.35 3021.85,6535.35 2938.19,6619.02 3053.35,6619.02
no net on Top Layer "Bottom Layer-No Net" (solid, remove dead copper, pour order 17): 1351.57,5851.31 1351.57,6796.17 1390.94,6835.55 1749.18,6835.55 1784.65,6871.02 1784.65,6993.03 1824.02,7032.4 2257.09,7032.4 2260.04,7032.4 2296.46,6995.98 2296.46,6678.07 2335.83,6638.7 2847.64,6638.7 3140.94,6638.7 3140.94,5851.3
no net on Bottom Layer "Bottom Layer-No Net" (solid, remove dead copper, pour order 16): 1351.57,5851.31 1351.57,6796.17 1390.94,6835.55 1749.18,6835.55 1784.65,6871.02 1784.65,6993.03 1824.02,7032.4 2257.09,7032.4 2260.04,7032.4 2296.46,6995.98 2296.46,6678.07 2335.83,6638.7 2847.64,6638.7 3140.94,6638.7 3140.94,5851.3

## Keep-outs
Top Layer:
  lines w19.68: 3140.94,6227.28 3140.94,6510.75
Bottom Layer:
  lines w19.68: 2887.01,6638.7 3020.87,6504.84 3140.94,6504.84 3140.94,5890.67
Multi-Layer:
  lines w19.68: 1351.57,5851.3 1351.57,6755.96 1391.8,6796.18 1745.28,6796.18 1784.65,6835.55 1843.7,6894.61 1843.7,7012.72 ; 1843.7,7012.72 1863.39,7032.4 ; 1843.7,7012.72 1863.39,7032.4 ; 1863.39,7032.4 2260.04,7032.4 ; 2260.04,7032.4 2296.46,6995.98 ; 2260.04,7032.4 2296.46,6995.98 ; 2296.46,6678.07 2335.83,6638.7 2296.46,6678.07 ; 2296.46,6678.07 2296.46,6995.98 ; 2296.46,6678.07 2296.46,6995.98

## Other copper
Top Layer:
  rectangle: 2889.57,6120.98 3046.46,6185.71
  rectangle: 3121.26,5863.11 3526.77,6038.31
  rectangle: 2889.96,6174.13 3103.54,6233.19
  rectangle: 3320.08,6073.1 3501.18,6225.31
  rectangle: 3268.9,6215.47 3352.56,6538.31
  rectangle: 3031.69,6701.69 3077.95,7070.79
  rectangle: 3133.23,6057.99 3237.4,6215.47
  rectangle: 3036.61,6342.44 3128.9,6512.72
  rectangle: 2934.25,6339.49 3005.12,6504.84
  rectangle: 3154.73,6223.34 3237.41,6508.43
  rectangle: 3109.45,6784.37 3196.06,7063.9
  rectangle: 2993.31,6832.6 3047.44,7070.79
  rectangle: 3086.81,6781.42 3155.71,6826.69
  rectangle: 3068.11,6702.68 3238.39,6743.03
  rectangle: 3037.6,6531.42 3105.51,6619.02
  rectangle: 3009.06,6547.17 3048.43,6662.32
  rectangle: 3137.01,6548.15 3238.39,6619.02
  rectangle: 3196.06,6607.2 3238.39,6715.47
  rectangle: 3102.56,6158.39 3148.82,6215.47
  rectangle: 3091.73,6174.13 3128.9,6350.31
  rectangle: 3031.69,6012.72 3123.23,6063.9
  rectangle: 3152.76,6756.81 3196.06,6796.18
Bottom Layer:
  rectangle: 2949.3,6674.55 3161.61,6790.28
Internal Plane 1 (plane layer: these items are gaps in the copper):
  lines w19.68: 1351.57,5851.31 1351.57,6756.8 1390.94,6796.18 1745.28,6796.18 ; 2887.01,6638.7 3020.87,6504.84 3144.88,6504.84 ; 3140.94,5851.3 3140.94,6500.91 ; 1745.28,6796.18 1843.7,6894.61 1843.7,7012.72 1863.39,7032.4 2260.04,7032.4 2296.46,6995.98 2296.46,6678.07 2335.83,6638.7 2335.83,6599.33 2296.46,6559.96 1781.11,6559.96 1745.28,6595.8 1745.28,6796.18
  lines w39.37: 2934.25,6181.02 3005.12,6181.02
Internal Plane 2 (plane layer: these items are gaps in the copper):
  lines w19.68: 1351.57,5851.3 1351.57,6756.81 1390.94,6796.18 1745.28,6796.18 1843.7,6894.61 1843.7,7012.72 ; 2335.83,6638.7 2296.46,6678.07 ; 2887.01,6638.7 3020.87,6504.84 3140.94,6504.84 3140.94,5851.3 ; 1843.7,7012.72 1863.39,7032.4 ; 1843.7,7012.72 1863.39,7032.4 ; 1863.39,7032.4 2257.09,7032.4 ; 1863.39,7032.4 2257.09,7032.4 ; 2257.09,7032.4 2260.04,7032.4 ; 2257.09,7032.4 2260.04,7032.4 ; 2260.04,7032.4 2296.46,6995.98 ; 2260.04,7032.4 2296.46,6995.98 ; 2296.46,6678.07 2296.46,6995.98 ; 2296.46,6678.07 2296.46,6995.98

## Silkscreen, mask and mechanical layers (free items; w line width, h text height)
Top Overlay:
  text "+" at 2343.7,6359.17 h78.74

## Text inside footprints (layer, text, board x,y; h text height)
F1300: Mechanical 1 "FUSE" at 2292.52,6477.28 h24.61